# Altium PCB 贴锁设置板201106.PcbDoc
Units mm, origin at the board's own origin, x right, y up, seen from the top; angles counter-clockwise.
Board outline 31.74 x 6.99 mm, 2 copper layers (Top Layer, Bottom Layer); 4 components, 5 nets, 13 pads, 2 vias.
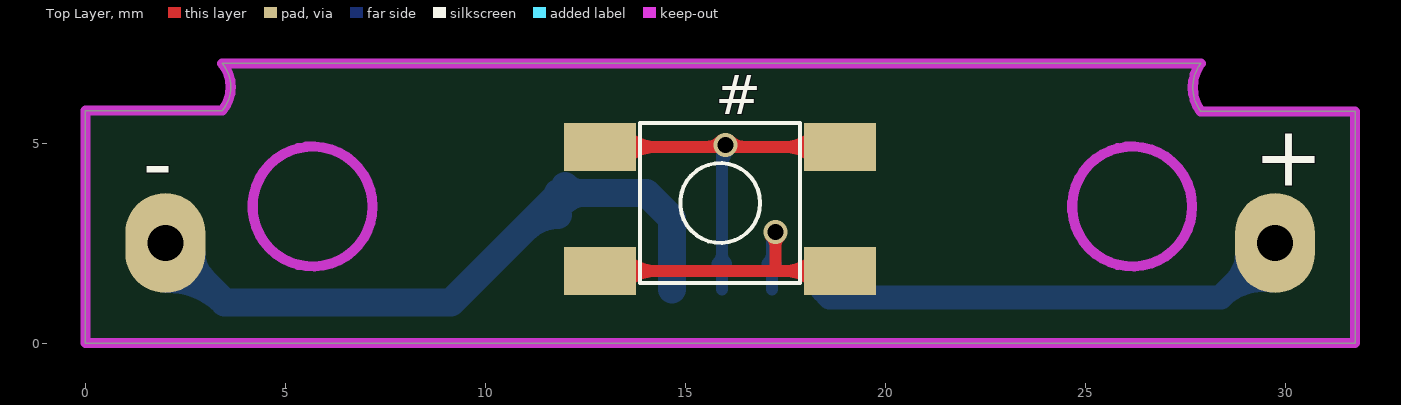
[diagram p0: Top Layer view]
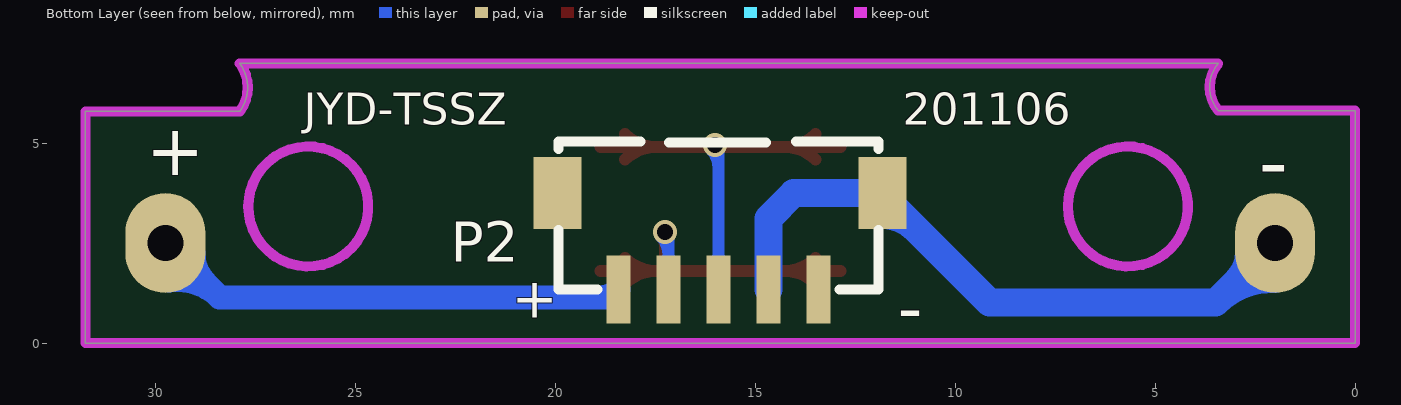
[diagram p1: Bottom Layer view, seen from below]

## Layer stack, top to bottom
Top Layer: signal copper 0.0356
Dielectric: dielectric 0.32, FR-4, Dk 4.8
Bottom Layer: signal copper 0.0356

## Board outline
0,0 0,5.811 3.423,5.811 ccw(c2.705,6.401) 3.423,6.991 27.884,6.991 ccw(c28.684,6.389) 27.884,5.788 31.743,5.788 31.743,0

## Design rules (kind name [scope] priority, off if disabled: settings)
Clearance [All] p1: gap=0.254
HoleToHoleClearance [All] p1: gap=0 allowstackedmicrovias=TRUE
MinimumSolderMaskSliver [All] p1: minsoldermaskwidth=0
PolygonConnect [All] p1: connectstyle=Relief reliefconductorwidth=0.254 reliefentries=4 polygonreliefangle="90 Angle" airgapwidth=0.254
RoutingVias [All] p1: holewidth=0.4 width=0.6 viastyle="Through Hole" minholewidth=0.4 minwidth=0.5 maxholewidth=0.6 maxwidth=0.6
SilkToSilkClearance [All] p1: silktosilkclearance=0
SilkToSolderMaskClearance [IsPad] p1: minsilkscreentomaskgap=0 clearancetoexposedcopper=TRUE
SolderMaskExpansion [All] p1: expansion=0.102
Width [All] p1: maxlimit=2 minlimit=0.1 preferedwidth=0.3
24 further rules are at their usual default settings.

## Components (designator, comment, footprint, x,y, rotation, side; value= is the part's Value field where it differs from the comment)
# "SW" SW3 15.87,3.5 r180 top
+ "" HANPAN#1 29.845,2.667 r0 top
- "" HANPAN#2 2.032,2.667 r0 top
P2 "设置板接口" 5P-1.25mm 15.875,2.54 r0 bottom

## Footprints (in the part's own frame and the unit in brackets; to place one, negate y for a bottom-side part, rotate by r counter-clockwise, add the part's x,y. Pads: shape width x height; smd on the part's side, far side on the other; paste and mask are expansions set on the pad)
5P-1.25mm [mm]
  rect 0.6x1.7 smd: 1(2.54,1.206) 2(1.29,1.206) 3(0.04,1.206) 4(-1.21,1.206) 5(-2.46,1.206)
  rect 1.2x1.8 smd: 7(4.064,-1.206) 8(-4.064,-1.206)
  silkscreen extent -3.96,-2.5 4.04,1.2
HANPAN#1 [mm]
  oval 2x2.5 hole 0.9: 1(-0.102,-0.167)
HANPAN#2 [mm]
  oval 2x2.5 hole 0.9: 1(-0.032,-0.167)
SW3 [mm]
  rect 1.8x1.2 smd: 1(-3,-1.403) 1(3,-1.403) 2(-3,1.697) 2(3,1.697)
  silkscreen extent -2,-2 2,2

## Part data
#: "Switch"
+ -: library part "Header 1", "Header, 1-Pin"
P2: library part "Header 5", "Header, 5-Pin"

## Via types
v1: diameter 0.6, hole 0.4, Top Layer to Bottom Layer, tented both sides, 2 vias

## Nets (pads, with @x,y where several pads share a name; then routed paths per layer and width w, separated by ;. In a path a pad name is that pad's centre, name@x,y a point inside that pad or via, vN(x,y) a via of type N, cw(c..) or ccw(c..) an arc to the next point about the centre after c; other vN are vias at no path point)
GND: -.1 P2.4 P2.8 | length 20.7
  Bottom Layer w0.7: -.1 3.484,1.016 ; -.1@2.018,1.6 cw(c2.072,-0.396) 3.484,1.016 ; -.1@2.65,2.25 ccw(c3.616,2.25) 2.933,1.567 ; 10.98,2.852 cw(c11.811,2.022) P2.8@11.811,3.196 ; P2.8@11.811,3.683 9.144,1.016 3.484,1.016 ; P2.8 14.034,3.746 14.665,3.115 P2.4 ; P2.8@11.988,3.57 cw(c12.415,3.143) 12.415,3.746 cw(c12.415,4.35) P2.8@11.988,3.923
KEYX_4: #.2 P2.2 | length 13.6
  Top Layer w0.3: #.2@12.87,1.803 17.272,1.803 ; #.2@13.488,1.485 cw(c14.256,0.717) 14.256,1.803 cw(c14.256,2.889) #.2@13.488,2.121 ; v1@17.146,2.668 cw(c16.89,2.412) 17.252,2.412 cw(c17.614,2.412) v1@17.358,2.668 ; v1(17.252,2.774) 17.252,1.823 17.272,1.803 ; #.2@18.252,1.485 ccw(c17.484,0.717) 17.484,1.803 ccw(c17.484,2.889) #.2@18.252,2.121 ; #.2@18.87,1.803 17.272,1.803
  Bottom Layer w0.3: P2.2@17.059,1.99 ccw(c16.803,2.246) 17.165,2.246 ccw(c17.527,2.246) P2.2@17.271,1.99 ; P2.2 17.165,2.774 v1(17.252,2.774) ; 17.165,2.202 cw(c17.824,2.202) v1@17.358,2.668
KEYY_1: #.1 P2.3 | length 15
  Top Layer w0.3: #.1@12.87,4.903 #.1@18.87,4.903 ; #.1@13.488,4.585 cw(c14.256,3.817) 14.256,4.903 cw(c14.256,5.989) #.1@13.488,5.221 ; 15.519,4.903 ccw(c15.519,5.436) v1@15.896,5.059 ; v1@16.108,5.059 ccw(c16.485,5.436) 16.485,4.903 ; #.1@18.252,4.585 ccw(c17.484,3.817) 17.484,4.903 ccw(c17.484,5.989) #.1@18.252,5.221
  Bottom Layer w0.3: P2.3@15.809,1.99 ccw(c15.553,2.246) 15.915,2.246 ccw(c16.277,2.246) P2.3@16.021,1.99 ; P2.3 15.915,4.866 v1(16.002,4.953) ; 15.915,4.381 cw(c16.574,4.381) v1@16.108,4.847
TIANX: P2.5
VBAT: +.1 P2.1 | length 14.7
  Bottom Layer w0.6: 18.875,1.143 cw(c18.875,1.793) P2.1 18.605,1.143 28.386,1.143 ; 28.725,1.482 ccw(c27.957,2.25) +.1@29.043,2.25 ; +.1@29.64,1.558 ccw(c29.425,0.104) 28.386,1.143 ; +.1 28.386,1.143
pads on no net: P2.7

## Keep-outs
Keep-Out Layer:
  circle w0.254: c5.68,3.413 r1.5
  circle w0.254: c26.17,3.413 r1.5
  lines w0.254: 27.884,5.788 31.743,5.788 31.743,0 0,0 0,5.811 3.423,5.811 ccw(c2.705,6.401) 3.423,6.991 27.884,6.991 ; 27.884,5.788 cw(c28.684,6.389) 27.884,6.991

## Silkscreen, mask and mechanical layers (free items; w line width, h text height)
Bottom Overlay:
  text "201106" at 11.303,5.461 h0.8
  text "JYD-TSSZ" at 26.289,5.461 h0.8
  text "+" at 30.226,4.191 h1.27
  text "-" at 2.413,3.81 h1.5
  text "+" at 21.082,0.635 h1
  text "-" at 11.43,0.254 h1.27